# EAGLE board NHK2016mother (EAGLE 9.6.1), part 1 of 2
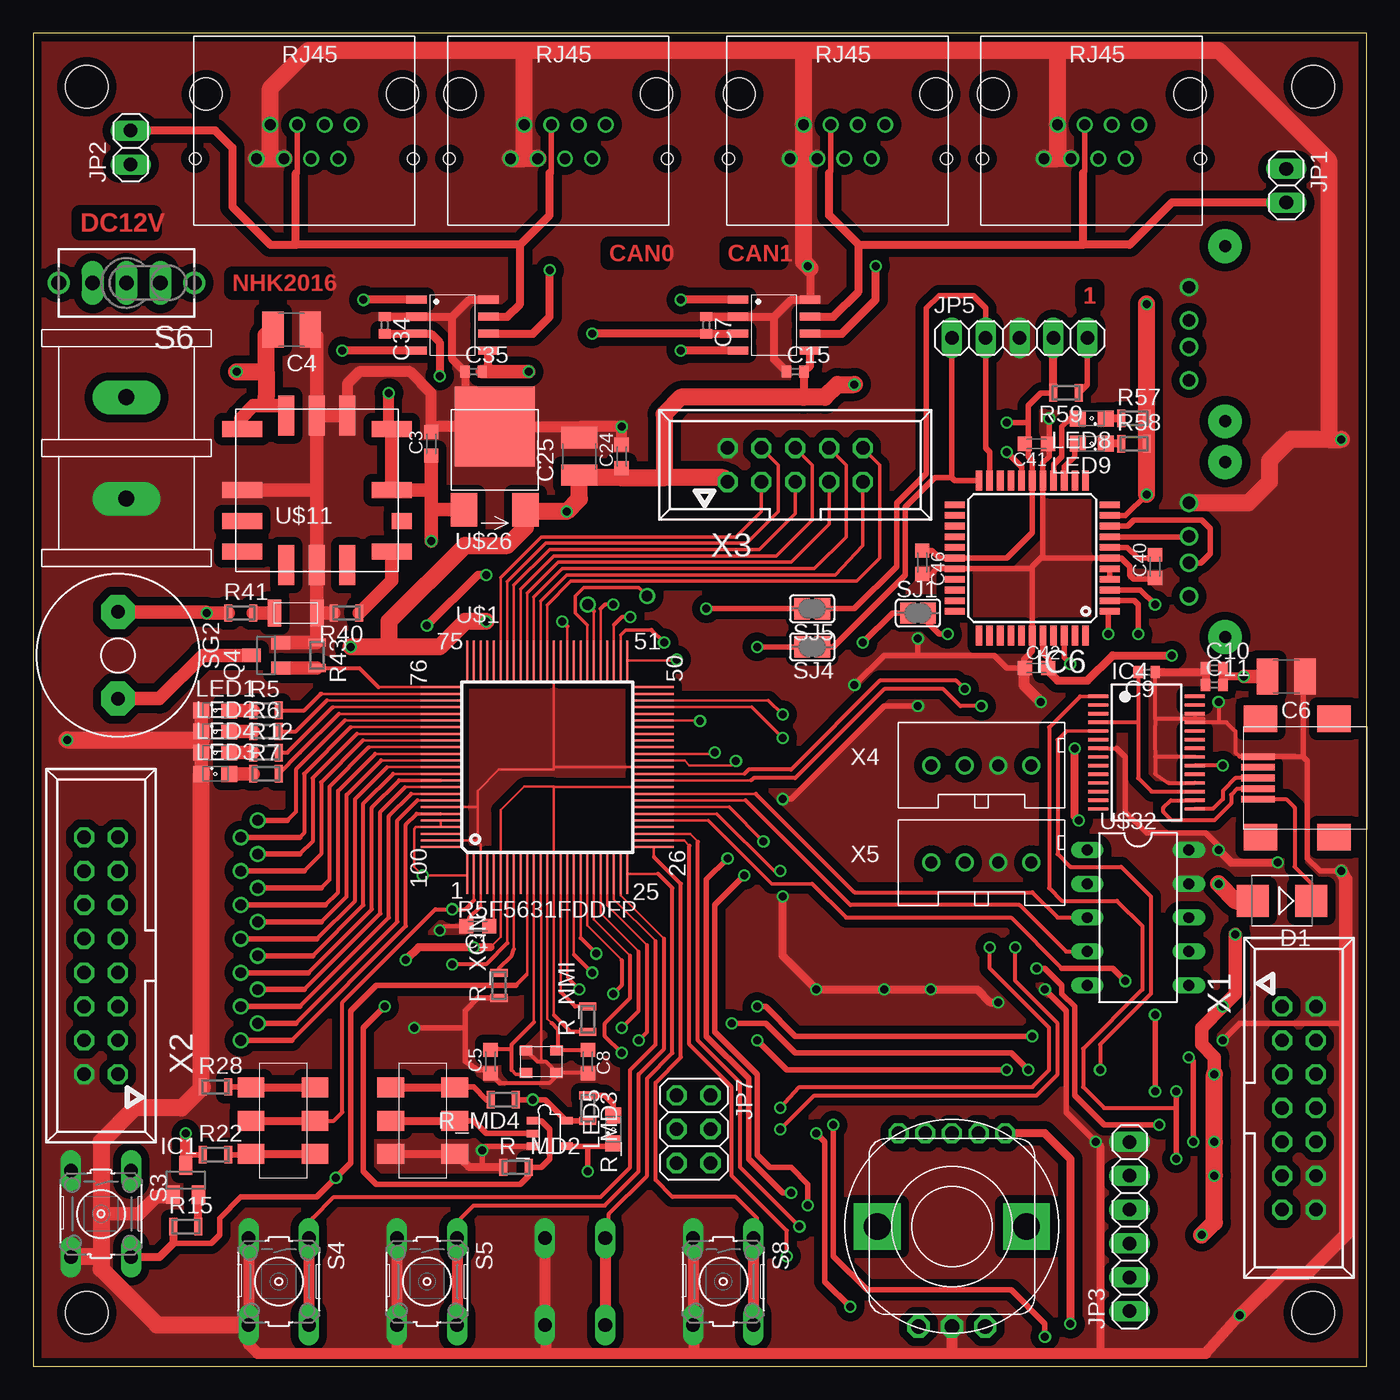
[diagram p0: board, top side]
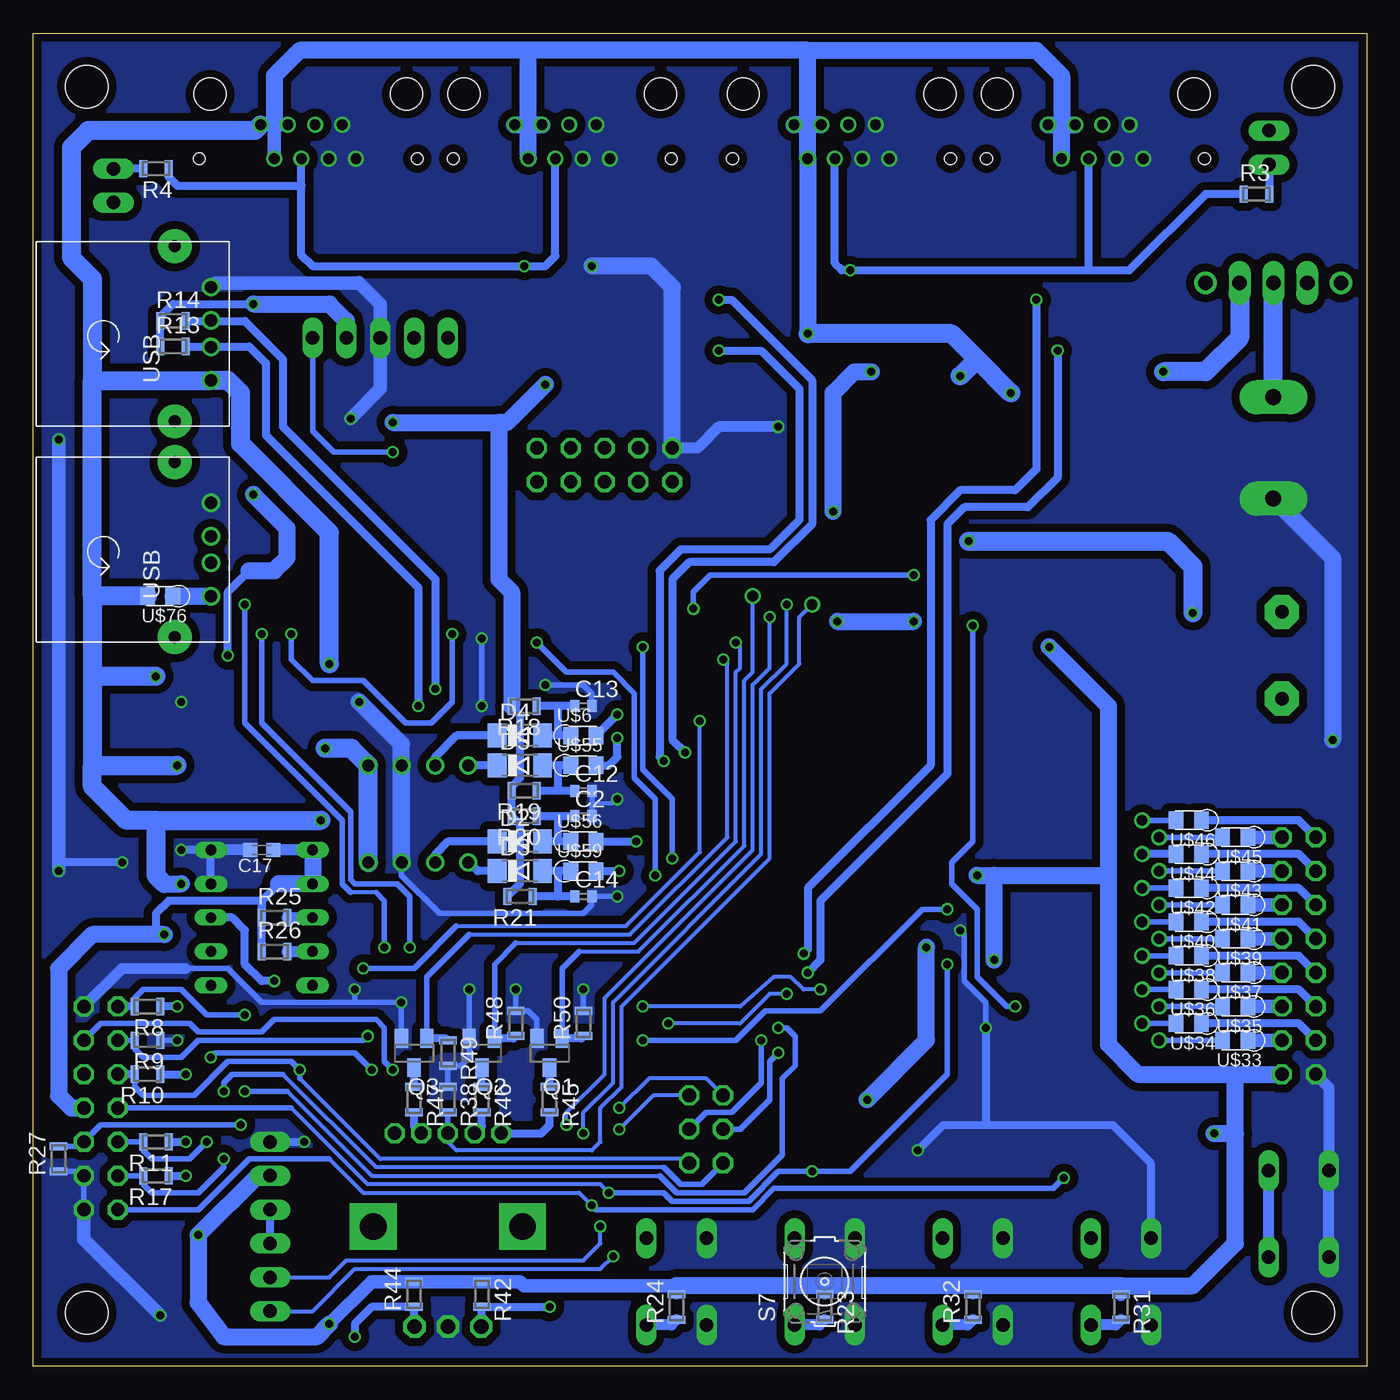
[diagram p1: board, bottom side, seen from below]

Size 100 x 100 mm. Coordinates in mm from the lower left corner, seen from the top.
Outline: 0,0 100,0 100,100 0,100 0,0
Copper layers (1*16): Top 0.035mm / dielectric 1.6mm / Bottom 0.035mm
Design rules "default": minimum track width 6mil, minimum drill 12mil, track to track 6mil, track to pad 6mil, pad to pad 6mil, via to via 8mil, smd to smd 0mil, copper to edge 20mil, drill to drill 10mil, minimum pad ring 6mil, minimum via ring 6mil, stop-mask expansion 0mil, vias tented up to drill 100mil, thermal gap 10mil
Holes 3.2 mm at 4,96 4,4 96,4 96,96

## Footprints (pad centres in the part's own frame; a part is rotated, then mirrored left to right if it is on the bottom)
C0603K = smd 1.05 x 1.08: 1 -0.875,0; 2 0.875,0
C0402 = smd 0.7 x 0.9: 1 -0.65,0; 2 0.65,0
C3225 = smd 1.6 x 2.7: 1 -1.4,0; 2 1.4,0
SMB = smd 2.4 x 2.4: A 2.2,0; C -2.2,0
SOD80C = smd 1.4 x 1.8: A 1.7,0; C -1.7,0
SOT23B-3 = smd 1 x 1.4: 1 -0.95,-1.1; 2 0.95,-1.1; 3 0,1.1
SSOP28 = smd 0.25 x 1.5: 1 -4.225,-3.625; 2 -3.575,-3.625; 3 -2.925,-3.625; 4 -2.275,-3.625; 5 -1.625,-3.625; 6 -0.975,-3.625; 7 -0.325,-3.625; 8 0.325,-3.625; 9 0.975,-3.625; 10 1.625,-3.625; 11 2.275,-3.625; 12 2.925,-3.625; 13 3.575,-3.625; 14 4.225,-3.625; 15 4.225,3.625; 16 3.575,3.625; 17 2.925,3.625; 18 2.275,3.625; 19 1.625,3.625; 20 0.975,3.625; 21 0.325,3.625; 22 -0.325,3.625; 23 -0.975,3.625; 24 -1.625,3.625; 25 -2.275,3.625; 26 -2.925,3.625; 27 -3.575,3.625; 28 -4.225,3.625
TQFP44 = smd 1.5 x 0.5: 1 -5.8,4; 2 -5.8,3.2; 3 -5.8,2.4; 4 -5.8,1.6; 5 -5.8,0.8; 6 -5.8,0; 7 -5.8,-0.8; 8 -5.8,-1.6; 9 -5.8,-2.4; 10 -5.8,-3.2; 11 -5.8,-4; 23 5.8,-4; 24 5.8,-3.2; 25 5.8,-2.4; 26 5.8,-1.6; 27 5.8,-0.8; 28 5.8,0; 29 5.8,0.8; 30 5.8,1.6; 31 5.8,2.4; 32 5.8,3.2; 33 5.8,4 | smd 0.5 x 1.5: 12 -4,-5.8; 13 -3.2,-5.8; 14 -2.4,-5.8; 15 -1.6,-5.8; 16 -0.8,-5.8; 17 0,-5.8; 18 0.8,-5.8; 19 1.6,-5.8; 20 2.4,-5.8; 21 3.2,-5.8; 22 4,-5.8; 34 4,5.8; 35 3.2,5.8; 36 2.4,5.8; 37 1.6,5.8; 38 0.8,5.8; 39 0,5.8; 40 -0.8,5.8; 41 -1.6,5.8; 42 -2.4,5.8; 43 -3.2,5.8; 44 -4,5.8
1X02 = drill 1.016 long: 1 -1.27,0; 2 1.27,0
1X06 = drill 1.016 long: 1 -6.35,0; 2 -3.81,0; 3 -1.27,0; 4 1.27,0; 5 3.81,0; 6 6.35,0
1X05 = drill 1.016 long: 1 -5.08,0; 2 -2.54,0; 3 0,0; 4 2.54,0; 5 5.08,0
2X03 = drill 1.016 octagon: 1 -2.54,-1.27; 2 -2.54,1.27; 3 0,-1.27; 4 0,1.27; 5 2.54,-1.27; 6 2.54,1.27
SML0805 = smd 1.2 x 1.2: A 1.05,0; C -1.05,0
SOT23 = smd 1 x 1.4: 1 -0.95,-1.1; 2 0.95,-1.1; 3 0,1.1
MINI_MELF-0102W = smd 0.6 x 1.3: 1 -0.95,0; 2 0.95,0
B3F-10XX = drill 1.016 long: 1 -3.251,2.261; 2 3.251,2.261; 3 -3.251,-2.261; 4 3.251,-2.261
TL3XYO = drill 1.1 pad 1.422 long: 1 -2.54,0; 2 0,0; 3 2.54,0 | drill 1.1 pad 1.676: M1 -5.08,0; M2 5.08,0
AL60P = drill 1.016 pad 2.54 octagon: 1 -3.251,0; 2 3.251,0
SJ = smd 1.168 x 1.6: 1 -0.762,0; 2 0.762,0
LQFP100 = smd 0.15 x 3: 1 -6.5,-7.5; 2 -6,-7.5; 3 -5.5,-7.5; 4 -5,-7.5; 5 -4.5,-7.5; 6 -4,-7.5; 7 -3.5,-7.5; 8 -3,-7.5; 9 -2.5,-7.5; 10 -2,-7.5; 11 -1.5,-7.5; 12 -1,-7.5; 13 -0.5,-7.5; 14 0,-7.5; 15 0.5,-7.5; 16 1,-7.5; 17 1.5,-7.5; 18 2,-7.5; 19 2.5,-7.5; 20 3,-7.5; 21 3.5,-7.5; 22 4,-7.5; 23 4.5,-7.5; 24 5,-7.5; 25 5.5,-7.5; 51 5.5,8.5; 52 5,8.5; 53 4.5,8.5; 54 4,8.5; 55 3.5,8.5; 56 3,8.5; 57 2.5,8.5; 58 2,8.5; 59 1.5,8.5; 60 1,8.5; 61 0.5,8.5; 62 0,8.5; 63 -0.5,8.5; 64 -1,8.5; 65 -1.5,8.5; 66 -2,8.5; 67 -2.5,8.5; 68 -3,8.5; 69 -3.5,8.5; 70 -4,8.5; 71 -4.5,8.5; 72 -5,8.5; 73 -5.5,8.5; 74 -6,8.5; 75 -6.5,8.5 | smd 3 x 0.15: 26 7.5,-5.5; 27 7.5,-5; 28 7.5,-4.5; 29 7.5,-4; 30 7.5,-3.5; 31 7.5,-3; 32 7.5,-2.5; 33 7.5,-2; 34 7.5,-1.5; 35 7.5,-1; 36 7.5,-0.5; 37 7.5,0; 38 7.5,0.5; 39 7.5,1; 40 7.5,1.5; 41 7.5,2; 42 7.5,2.5; 43 7.5,3; 44 7.5,3.5; 45 7.5,4; 46 7.5,4.5; 47 7.5,5; 48 7.5,5.5; 49 7.5,6; 50 7.5,6.5; 76 -8.5,6.5; 77 -8.5,6; 78 -8.5,5.5; 79 -8.5,5; 80 -8.5,4.5; 81 -8.5,4; 82 -8.5,3.5; 83 -8.5,3; 84 -8.5,2.5; 85 -8.5,2; 86 -8.5,1.5; 87 -8.5,1; 88 -8.5,0.5; 89 -8.5,0; 90 -8.5,-0.5; 91 -8.5,-1; 92 -8.5,-1.5; 93 -8.5,-2; 94 -8.5,-2.5; 95 -8.5,-3; 96 -8.5,-3.5; 97 -8.5,-4; 98 -8.5,-4.5; 99 -8.5,-5; 100 -8.5,-5.5
MUSB-5BF02AS-N = smd 0.5 x 2.5: 1 1.6,1.05; 2 0.8,1.05; 3 0,1.05; 4 -0.8,1.05; 5 -1.6,1.05 | smd 2 x 2.5: P$6 4.45,1.25; P$7 -4.45,1.25; P$8 4.45,6.75; P$9 -4.45,6.75
MCP2562 = smd 1.55 x 0.6: 1 -2.7,2.54; 2 -2.7,1.27; 3 -2.7,0; 4 -2.7,-1.27; 5 2.7,-1.27; 6 2.7,0; 7 2.7,1.27; 8 2.7,2.54
RJ45 = drill 0.8: P$1 -3.57,-0.44; P$2 -2.55,2.1; P$3 -1.53,-0.44; P$4 -0.51,2.1; P$5 0.51,-0.44; P$6 1.53,2.1; P$7 2.55,-0.44; P$8 3.57,2.1 | hole 2.4: -7.375,-2.74; 7.375,-2.74 | hole 0.9: -8.175,2.1; 8.175,2.1
2012 = smd 1.1 x 1.3: 1 -0.95,0; 2 0.95,0
SSSS2 = smd 1.5 x 2: 1 -2.5,2.4; 2 0,2.4; 3 2.5,2.4; 4 -2.5,-2.4; 5 0,-2.4; 6 2.5,-2.4
ＦＲ１１０５Ｗ－ＴＲ = smd 1 x 2: A -1.6,0; K 1.6,0
TERMINAL = drill 1.2 pad 2.54 long: P$1 -3.81,0; P$2 3.81,0
OKL_T6_W12 = smd 1.2 x 3: GND@0 0,-5.6; GND@1 2.29,5.6; GND@2 0,5.6; NC@1 -2.29,-5.6; NC@2 2.29,-5.6; VIN@0 -2.29,5.6 | smd 3 x 1.2: NC@0 -5.6,-4.58; ON/OFF -5.6,0; PGOOD -5.6,-2.29; SENSE 5.6,0; TRIM 5.6,-4.58; VIN@1 -5.6,4.58; VOUT 5.6,4.58 | smd 1.5 x 1.2: NC@3 6.35,-2.29
TO-252-3-L1 = smd 2 x 2.5: 1 -2.3,-4; 3 2.3,-4 | smd 6 x 6: 2 0,2.25
USB_A = drill 0.92: 1 3.5,0; 2 1,0; 3 -1,0; 4 -3.5,0 | drill 0.9 pad 2.54: PAD@1 6.57,-2.71; PAD@2 -6.57,-2.71
MPU9150 = drill 0.813 long: 1 -5.08,-3.81; 2 -2.54,-3.81; 3 0,-3.81; 4 2.54,-3.81; 5 5.08,-3.81; 6 5.08,3.81; 7 2.54,3.81; 8 0,3.81; 9 -2.54,3.81; 10 -5.08,3.81
EC12PLRGBSDVBF = drill 1 pad 1.422 octagon: 1 -4,7; 2 -2,7; 3 0,7; 4 2,7; 5 4,7 | drill 1.1 pad 1.676 octagon: 6 2.5,-7.5; 7 0,-7.5; 8 -2.5,-7.5 | drill 2 pad 3.5 square: P$9 -5.6,0; P$10 5.6,0
FA238V = smd 0.95 x 0.75: 1 -1.15,-0.85; 2 1.15,-0.85; 3 1.15,0.85; 4 -1.15,0.85
SOT23-5 = smd 0.57 x 0.95: 1 -0.95,-1.25; 2 0,-1.25; 3 0.95,-1.25; 4 0.95,1.25; 5 -0.95,1.25
057-014-1 = drill 1 octagon: 1 -7.62,-1.27; 2 -7.62,1.27; 3 -5.08,-1.27; 4 -5.08,1.27; 5 -2.54,-1.27; 6 -2.54,1.27; 7 0,-1.27; 8 0,1.27; 9 2.54,-1.27; 10 2.54,1.27; 11 5.08,-1.27; 12 5.08,1.27; 13 7.62,-1.27; 14 7.62,1.27
057-016-1 = drill 1 octagon: 1 -8.89,-1.27; 2 -8.89,1.27; 3 -6.35,-1.27; 4 -6.35,1.27; 5 -3.81,-1.27; 6 -3.81,1.27; 7 -1.27,-1.27; 8 -1.27,1.27; 9 1.27,-1.27; 10 1.27,1.27; 11 3.81,-1.27; 12 3.81,1.27; 13 6.35,-1.27; 14 6.35,1.27; 15 8.89,-1.27; 16 8.89,1.27
057-010-1 = drill 1 octagon: 1 -5.08,-1.27; 2 -5.08,1.27; 3 -2.54,-1.27; 4 -2.54,1.27; 5 0,-1.27; 6 0,1.27; 7 2.54,-1.27; 8 2.54,1.27; 9 5.08,-1.27; 10 5.08,1.27
XA-4P = drill 0.9: 1 -3.75,0; 2 -1.25,0; 3 1.25,0; 4 3.75,0

## Placement (x,y rotation side)
C1  0.1uF  [C0603K]  33.34,33.02 180 top
C2  0.01u  [C0402]  58.74,41.27 0 bottom
C3  0.1uF  [C0603K]  29.84,69.22 90 top
C4  47u  [C3225]  19.37,77.79 180 top
C5  22p  [C0603K]  34.29,22.86 90 top
C6  47u  [C3225]  93.98,51.75 180 top
C7  0.1u  [C0402]  50.48,78.11 270 top
C8  22p  [C0603K]  41.59,22.86 270 top
C9  0.1u  [C0402]  83.5,52.07 180 top
C10  0.1u  [C0402]  88.58,52.39 0 top
C11  0.1u  [C0402]  88.58,51.12 0 top
C12  0.01u  [C0402]  58.74,43.18 0 bottom
C13  0.01u  [C0402]  58.74,49.53 0 bottom
C14  0.01u  [C0402]  58.74,35.24 0 bottom
C15  0.1u  [C0402]  57.15,74.61 0 top
C17  0.1uF  [C0603K]  82.87,38.73 180 bottom
C24  0.1uF  [C0603K]  44.13,68.26 90 top
C25  47u  [C3225]  40.96,68.26 90 top
C34  0.1u  [C0402]  26.35,78.11 270 top
C35  0.1u  [C0402]  33.02,74.61 0 top
C40  10u  [C0603K]  84.14,60.01 90 top
C41  0.1u  [C0603K]  75.25,69.22 180 top
C42  0.1u  [C0603K]  75.25,52.39 0 top
C46  0.1u  [C0603K]  66.67,60.33 270 top
D1  ES2D  [SMB]  93.66,34.92 180 top
D2  PMLL4150  [SOD80C]  63.5,39.37 0 bottom
D3  PMLL4150  [SOD80C]  63.5,37.15 0 bottom
D4  PMLL4150  [SOD80C]  63.5,47.31 0 bottom
D5  PMLL4150  [SOD80C]  63.5,45.09 0 bottom
IC1  [SOT23B-3]  11.43,13.97 0 top
IC4  FT232RL  [SSOP28]  83.5,46.04 270 top
IC6  PIC24FJ64GA004  [TQFP44]  74.93,60.64 180 top
JP1  [1X02]  93.98,88.58 270 top
JP2  [1X02]  7.3,91.44 90 top
JP3  [1X06]  82.23,10.48 90 top
JP5  [1X05]  73.98,77.15 0 top
JP7  [2X03]  49.53,17.78 270 top
LED1  [SML0805]  13.65,49.21 0 top
LED2  [SML0805]  13.65,47.62 0 top
LED3  [SML0805]  13.65,44.45 0 top
LED4  [SML0805]  13.65,46.04 0 top
LED5  [SML0805]  43.5,17.78 90 top
LED8  [SML0805]  79.38,71.12 180 top
LED9  [SML0805]  79.38,69.22 180 top
Q1  [SOT23]  61.28,23.5 180 bottom
Q2  [SOT23]  66.36,23.5 180 bottom
Q3  [SOT23]  71.44,23.5 180 bottom
Q4  [SOT23]  17.46,53.34 90 top
R3  120  [MINI_MELF-0102W]  8.26,87.95 0 bottom
R4  120  [MINI_MELF-0102W]  90.81,89.85 180 bottom
R5  [MINI_MELF-0102W]  17.46,49.21 0 top
R6  [MINI_MELF-0102W]  17.46,47.62 0 top
R7  [MINI_MELF-0102W]  17.46,44.45 0 top
R8  10k  [MINI_MELF-0102W]  91.44,26.99 180 bottom
R9  10k  [MINI_MELF-0102W]  91.44,24.45 180 bottom
R10  10k  [MINI_MELF-0102W]  91.44,21.91 180 bottom
R11  10k  [MINI_MELF-0102W]  90.81,16.83 180 bottom
R12  [MINI_MELF-0102W]  17.46,46.04 0 top
R13  22  [MINI_MELF-0102W]  89.53,76.52 0 bottom
R14  22  [MINI_MELF-0102W]  89.53,78.42 0 bottom
R15  [MINI_MELF-0102W]  11.43,10.48 0 top
R17  10k  [MINI_MELF-0102W]  90.81,14.29 180 bottom
R18  200  [MINI_MELF-0102W]  63.18,49.53 180 bottom
R19  200  [MINI_MELF-0102W]  63.18,43.18 180 bottom
R20  200  [MINI_MELF-0102W]  63.18,41.27 180 bottom
R21  200  [MINI_MELF-0102W]  63.5,35.24 180 bottom
R22  10k  [MINI_MELF-0102W]  13.65,15.88 0 top
R23  [MINI_MELF-0102W]  40.64,4.45 270 bottom
R24  [MINI_MELF-0102W]  51.75,4.45 90 bottom
R25  1k  [MINI_MELF-0102W]  81.92,33.66 0 bottom
R26  1k  [MINI_MELF-0102W]  81.92,31.11 0 bottom
R27  10k  [MINI_MELF-0102W]  98.11,15.56 90 bottom
R28  0  [MINI_MELF-0102W]  13.65,20.95 0 top
R31  [MINI_MELF-0102W]  18.41,4.45 270 bottom
R32  [MINI_MELF-0102W]  29.53,4.45 90 bottom
R38  [MINI_MELF-0102W]  68.9,20 270 bottom
R40  1.33k  [MINI_MELF-0102W]  23.5,56.52 180 top
R41  120  [MINI_MELF-0102W]  15.56,56.52 0 top
R42  [MINI_MELF-0102W]  66.36,5.4 270 bottom
R43  10k  [MINI_MELF-0102W]  21.27,53.34 270 top
R44  [MINI_MELF-0102W]  71.44,5.4 90 bottom
R45  [MINI_MELF-0102W]  61.28,20 270 bottom
R46  [MINI_MELF-0102W]  66.36,20 270 bottom
R47  [MINI_MELF-0102W]  71.44,20 270 bottom
R48  10k  [MINI_MELF-0102W]  63.82,25.72 90 bottom
R49  10k  [MINI_MELF-0102W]  68.9,23.5 270 bottom
R50  10k  [MINI_MELF-0102W]  58.74,25.72 90 bottom
R57  1k  [MINI_MELF-0102W]  82.55,71.12 0 top
R58  1k  [MINI_MELF-0102W]  82.55,69.22 0 top
R59  10k  [MINI_MELF-0102W]  77.47,73.03 180 top
R_MD2  [MINI_MELF-0102W]  36.2,14.92 0 top
R_MD3  [MINI_MELF-0102W]  41.59,19.37 270 top
R_MD4  [MINI_MELF-0102W]  35.24,20 180 top
R_NMI  [MINI_MELF-0102W]  41.59,26.04 90 top
R_XCIN  [MINI_MELF-0102W]  34.92,28.57 90 top
S3  [B3F-10XX]  5.08,11.43 270 top
S4  [B3F-10XX]  18.41,6.35 270 top
S5  [B3F-10XX]  29.53,6.35 270 top
S6  TL32YO  [TL3XYO]  6.99,81.28 180 top
S7  [B3F-10XX]  40.64,6.35 90 bottom
S8  [B3F-10XX]  51.75,6.35 270 top
SG2  AL60P  [AL60P]  6.35,53.34 270 top
SJ1  [SJ]  66.36,56.52 0 top
SJ4  [SJ]  58.42,53.98 180 top
SJ5  [SJ]  58.42,56.83 180 top
U$1  R5F5631FDDFP  [LQFP100]  39.05,44.45 0 top
U$2  MUSB-5BF02AS-N  [MUSB-5BF02AS-N]  90.81,44.13 270 top
U$3  MCP2562  [MCP2562]  55.56,77.47 0 top
U$4  RJ45  [RJ45]  79.38,92.71 180 top
U$5  RJ45  [RJ45]  60.33,92.71 180 top
U$6  FB1.25MM  [2012]  58.74,47.31 0 bottom
U$7  SSSS2  [SSSS2]  18.73,18.41 270 top
U$8  ＦＲ１１０５Ｗ－ＴＲ  [ＦＲ１１０５Ｗ－ＴＲ]  19.68,56.52 0 top
U$9  RJ45  [RJ45]  39.37,92.71 180 top
U$10  TERMINAL  [TERMINAL]  6.99,68.9 270 top
U$11  OKL_T6_W12  [OKL_T6_W12]  21.27,65.72 0 top
U$17  MCP2562  [MCP2562]  31.43,77.47 0 top
U$26  NJM2845DL1  [TO-252-3-L1]  34.61,68.26 0 top
U$27  RJ45  [RJ45]  20.32,92.71 180 top
U$29  USB_A  [USB_A]  86.68,77.47 270 bottom
U$32  MPU9150  [MPU9150]  82.87,33.66 270 top
U$33  FB1.25MM  [2012]  9.84,24.45 180 bottom
U$34  FB1.25MM  [2012]  13.34,25.72 180 bottom
U$35  FB1.25MM  [2012]  9.84,26.99 180 bottom
U$36  FB1.25MM  [2012]  13.34,28.26 180 bottom
U$37  FB1.25MM  [2012]  9.84,29.53 180 bottom
U$38  FB1.25MM  [2012]  13.34,30.8 180 bottom
U$39  FB1.25MM  [2012]  9.84,32.07 180 bottom
U$40  FB1.25MM  [2012]  13.34,33.34 180 bottom
U$41  FB1.25MM  [2012]  9.84,34.61 180 bottom
U$42  FB1.25MM  [2012]  13.34,35.88 180 bottom
U$43  FB1.25MM  [2012]  9.84,37.15 180 bottom
U$44  FB1.25MM  [2012]  13.34,38.42 180 bottom
U$45  FB1.25MM  [2012]  9.84,39.69 180 bottom
U$46  FB1.25MM  [2012]  13.34,40.96 180 bottom
U$55  FB1.25MM  [2012]  58.74,45.09 0 bottom
U$56  FB1.25MM  [2012]  58.74,39.37 0 bottom
U$58  EC12PLRGBSDVBF  [EC12PLRGBSDVBF]  68.9,10.48 0 top
U$59  FB1.25MM  [2012]  58.74,37.15 0 bottom
U$61  FA238V  [FA238V]  38.1,22.86 180 top
U$68  3STATE  [SOT23-5]  38.73,17.46 270 top
U$75  USB_A  [USB_A]  86.68,61.28 270 bottom
U$76  FB1.25MM  [2012]  90.49,57.78 180 bottom
U$82  SSSS2  [SSSS2]  29.21,18.41 90 top
X1  057-014-1  [057-014-1]  94.93,19.37 270 top
X2  057-016-1  [057-016-1]  5.08,30.8 90 top
X3  057-010-1  [057-010-1]  57.15,67.63 0 top
X4  XA-4PNORMAL  [XA-4P]  71.12,45.09 180 top
X5  XA-4PNORMAL  [XA-4P]  71.12,37.78 180 top

## Library data of the parts
C1-C15 C17 C24 C25 C34 C35 C40-C42 C46 R3-R15 R17-R28 R31 R32 R38 R40-R50 R57-R59 R_MD2-R_MD4 R_NMI R_XCIN = rcl
D1-D5 = diode
IC1 = telcom; MF: MICROCHIP; MPN: TCM809MENB713; OC_FARNELL: 9762744; OC_NEWARK: 96K3998
IC4 = ftdichip; MPN: FT232RL; OC_FARNELL: 1146032; OC_NEWARK: 91K9918
IC6 = microchip; MPN: PIC24FJ64GA004-E/PT; OC_FARNELL: 1332299; OC_NEWARK: 98M1927
JP1-JP3 JP5 JP7 = pinhead
LED1-LED5 LED8 LED9 = led
Q1-Q4 = adafruit
S3-S5 S7 S8 = switch-omron; MPN: B3F-1000; OC_FARNELL: 176432; OC_NEWARK: 36M3542
S6 = switch
SG2 = buzzer; OC_FARNELL: unknown; OC_NEWARK: unknown
SJ1 SJ4 SJ5 = jumper
U$1 = RX631
U$2 U$3 U$7 U$17 U$61 U$82 = kerawo
U$4 U$5 U$9-U$11 U$27 U$29 U$32 U$58 U$68 U$75 = 0Lib
U$6 U$26 U$33-U$46 U$55 U$56 U$59 U$76 = CQ
U$8 = FR1105W-TR
X1-X3 = con-panduit; OC_FARNELL: unknown; OC_NEWARK: unknown
X4 X5 = XA-Connectors

## Nets
+3V3: C15.2 C17.1 C24.1 C25.1 C35.2 C41.2 C42.2 C46.1 IC1.3 IC6.10 IC6.17 IC6.28 IC6.40 JP3.5 JP5.4 R8.1 R10.1 R11.1 R13.1 R14.1 R17.1 R18.2 R19.2 R20.2 R21.2 R22.1 R23.1 R24.2 R25.1 R26.1 R31.1 R32.2 R42.1 R44.2 R57.2 R58.2 R59.2 R_MD3.2 R_MD4.1 R_NMI.1 U$1.1 U$1.6 U$1.14 U$1.35 U$1.60 U$1.96 U$1.97 U$3.5 U$17.5 U$26.3 U$32.1 U$32.2 U$58.5 U$68.5 X1.8 X2.1 X3.1
AN000: U$1.95 U$33.2
AN001: U$1.93 U$34.2
AN002: U$1.92 U$35.2
AN003: U$1.91 U$36.2
AN004: U$1.90 U$37.2
AN005: U$1.89 U$38.2
AN006: U$1.88 U$39.2
AN007: U$1.87 U$40.2
AN008: U$1.86 U$41.2
AN009: U$1.85 U$42.2
AN010: U$1.84 U$43.2
AN011: U$1.83 U$44.2
AN012: U$1.82 U$45.2
AN013: U$1.81 U$46.2
CRX0: U$1.17 U$17.4
CRX1: U$1.39 U$3.4
CTS-RTS0: JP3.3 JP3.4
CTS/RTS: IC6.4 IC6.5
CTX0: U$1.18 U$17.1
CTX1: U$1.40 U$3.1
E: U$1.58
E1-RXD1: IC4.1 JP7.5 R17.2 X1.11
E1-TXD1: IC4.5 JP7.6 R10.2 X1.5
EMLE: U$1.2 U$7.2 U$7.5 X1.4
ENC-A: R42.2 U$1.55 U$58.8
ENC-B: R44.1 U$1.53 U$58.6
ENC-BLUE: Q3.1 R49.1 U$1.51
ENC-GREEN: Q2.1 R48.1 U$1.52
ENC-RED: Q1.1 R50.1 U$1.57
ENC-SW: R38.2 U$1.56 U$58.3
EXTAL: C8.1 U$1.13 U$61.1
GND: C1.2 C2.2 C3.2 C4.1 C5.1 C6.1 C7.1 C8.2 C9.1 C10.1 C11.1 C12.2 C13.2 C14.2 C15.1 C17.2 C24.2 C25.2 C34.1 C35.1 C40.1 C41.1 C42.1 C46.2 IC1.1 IC4.7 IC4.18 IC4.21 IC4.25 IC4.26 IC6.6 IC6.16 IC6.29 IC6.39 JP3.6 JP5.3 LED1.C LED2.C LED3.C LED4.C Q1.2 Q2.2 Q3.2 Q4.2 R9.1 R27.1 R28.1 R38.1 R40.2 R43.1 R48.2 R49.2 R50.2 R_MD2.1 R_XCIN.1 S3.3 S3.4 S4.3 S4.4 S5.3 S5.4 S7.3 S7.4 S8.3 S8.4 U$1.3 U$1.12 U$1.38 U$1.62 U$1.94 U$1.99 U$2.5 U$3.2 U$3.8 U$4.P$6 U$4.P$7 U$4.P$8 U$5.P$6 U$5.P$7 U$5.P$8 U$8.K U$9.P$6 U$9.P$7 U$9.P$8 U$10.P$2 U$11.GND@0 U$11.GND@1 U$11.GND@2 U$11.ON/OFF U$17.2 U$17.8 U$26.2 U$27.P$6 U$27.P$7 U$27.P$8 U$29.4 U$32.9 U$32.10 U$58.7 U$61.2 U$61.4 U$68.3 U$75.4 U$82.1 U$82.4 X1.2 X1.12 X1.14 X2.2 X3.2 X4.2 X5.2
IMU_INT: U$1.30 U$32.8
MD: LED5.C SJ4.2 U$1.7 U$68.4 X1.7
MODE_SW_EN: R_MD2.2 SJ5.2 U$68.1
MTCLKA: U$1.32 U$56.2
MTCLKA_I: C2.1 D2.A R20.1 U$56.1
MTCLKB: U$1.31 U$59.2
MTCLKB_I: C14.1 D3.A R21.1 U$59.1
MTCLKC: U$1.48 U$6.2
MTCLKC_I: C13.1 D4.A R18.1 U$6.1
MTCLKD: U$1.47 U$55.2
MTCLKD_I: C12.1 D5.A R19.1 U$55.1
MTIOC4A: Q4.1 R43.2 U$1.76
N$1: R_XCIN.2 U$1.8
N$2: R_NMI.2 U$1.15
N$3: LED5.A R_MD3.1
N$4: R22.2 U$7.3 U$7.6
N$5: IC4.16 U$2.2
N$6: IC4.15 U$2.3
N$7: JP2.1 R3.2
N$8: JP1.2 U$3.7 U$4.P$5 U$5.P$5
N$9: R4.1 U$3.6 U$4.P$4 U$5.P$4
N$10: JP1.1 R4.2
N$11: R5.2 U$1.77
N$12: R6.2 U$1.78
N$13: R7.2 U$1.80
N$14: JP2.2 U$9.P$5 U$17.7 U$27.P$5
N$15: R3.1 U$9.P$4 U$17.6 U$27.P$4
N$16: LED1.A R5.1
N$17: IC1.2 R15.2
N$18: LED2.A R6.1
N$19: LED3.A R7.1
N$20: R12.2 U$1.79
N$21: LED4.A R12.1
N$22: C9.2 IC4.4 IC4.17
N$24: R28.2 U$7.1 U$7.4
N$25: D5.C X4.4
N$26: D4.C X4.3
N$27: D2.C X5.3
N$28: D3.C X5.4
N$29: R41.2 U$8.A
N$30: R40.1 U$11.TRIM
N$32: C1.1 U$1.5
N$59: U$33.1 X2.3
N$60: U$34.1 X2.4
N$61: U$35.1 X2.5
N$62: U$36.1 X2.6
N$63: U$37.1 X2.7
N$64: U$38.1 X2.8
N$65: U$39.1 X2.9
N$66: U$40.1 X2.10
N$67: U$41.1 X2.11
N$68: U$42.1 X2.12
N$69: U$43.1 X2.13
N$70: U$44.1 X2.14
N$71: U$45.1 X2.15
N$72: U$46.1 X2.16
N$77: Q4.3 SG2.2
N$86: Q1.3 R45.1
N$90: U$68.2 U$82.2 U$82.5
N$91: R45.2 U$58.1
N$93: R46.2 U$58.2
N$94: R47.2 U$58.4
N$95: Q2.3 R46.1
N$96: Q3.3 R47.1
N$98: LED8.C R57.1
N$99: LED9.C R58.1
N$100: IC6.15 LED8.A
N$101: IC6.14 LED9.A
N$102: C40.2 IC6.7
N$103: U$75.1 U$76.1
N$104: R_MD4.2 U$82.3 U$82.6
NMCLR: IC6.18 JP5.5 R59.1
P22: R24.1 S8.1 S8.2 U$1.26
P23: R23.2 S7.1 S7.2 U$1.25
P24: R32.1 S5.1 S5.2 U$1.24
P25: R31.2 S4.1 S4.2 U$1.23
PA0: U$1.70 X3.3
PA1: U$1.69 X3.4
PA2: U$1.68 X3.5
PA3: U$1.67 X3.6
PA4: U$1.66 X3.7
PA5: U$1.65 X3.8
PA6: U$1.64 X3.9
PA7: U$1.63 X3.10
PC7: R27.2 U$1.45 X1.10
PE3: U$1.75
PE4: U$1.74
PE5: U$1.73
PE6: U$1.72
PGEC1: IC6.22 JP5.1 SJ4.1
PGED1: IC6.21 JP5.2 SJ5.1
PIC_DM: IC6.9 U$75.2
PIC_DP: IC6.8 U$75.3
RB9: IC6.1 SJ1.2
RES#: R15.1 S3.1 S3.2 SJ1.1 U$1.10 X1.13
RS: U$1.59
RXD0: JP3.1 U$1.27
RXD1: JP7.3 U$1.20
RXD2: U$1.42
SBDBT1-RX: IC6.3 JP7.2
SBDBT1-TX: IC6.2 JP7.1
SCL0: R25.2 U$1.34 U$32.3
SDA0: R26.2 U$1.33 U$32.4
TCK: R8.2 U$1.21 X1.1
TMS: R11.2 U$1.19 X1.9
TRST#: R9.2 U$1.16 X1.3
TXD0: JP3.2 U$1.28
TXD1: JP7.4 U$1.22
TXD2: U$1.44
USB0_DM: R13.2 U$1.36 U$29.2
USB0_DP: R14.2 U$1.37 U$29.3
VBUS0: D1.C U$2.1
VCC: C3.1 C6.2 C7.2 C10.2 C11.2 C34.2 D1.A IC4.20 IC6.42 R41.1 SG2.1 U$3.3 U$4.P$1 U$4.P$2 U$4.P$3 U$5.P$1 U$5.P$2 U$5.P$3 U$9.P$1 U$9.P$2 U$9.P$3 U$11.SENSE U$11.VOUT U$17.3 U$26.1 U$27.P$1 U$27.P$2 U$27.P$3 U$29.1 U$76.2 X4.1 X5.1
VIN1: S6.2 U$10.P$1
VIN2: C4.2 S6.1 U$11.VIN@0 U$11.VIN@1
XTAL: C5.2 U$1.11 U$61.3